# EAGLE board Orion Ground Base (EAGLE 9.2.2)
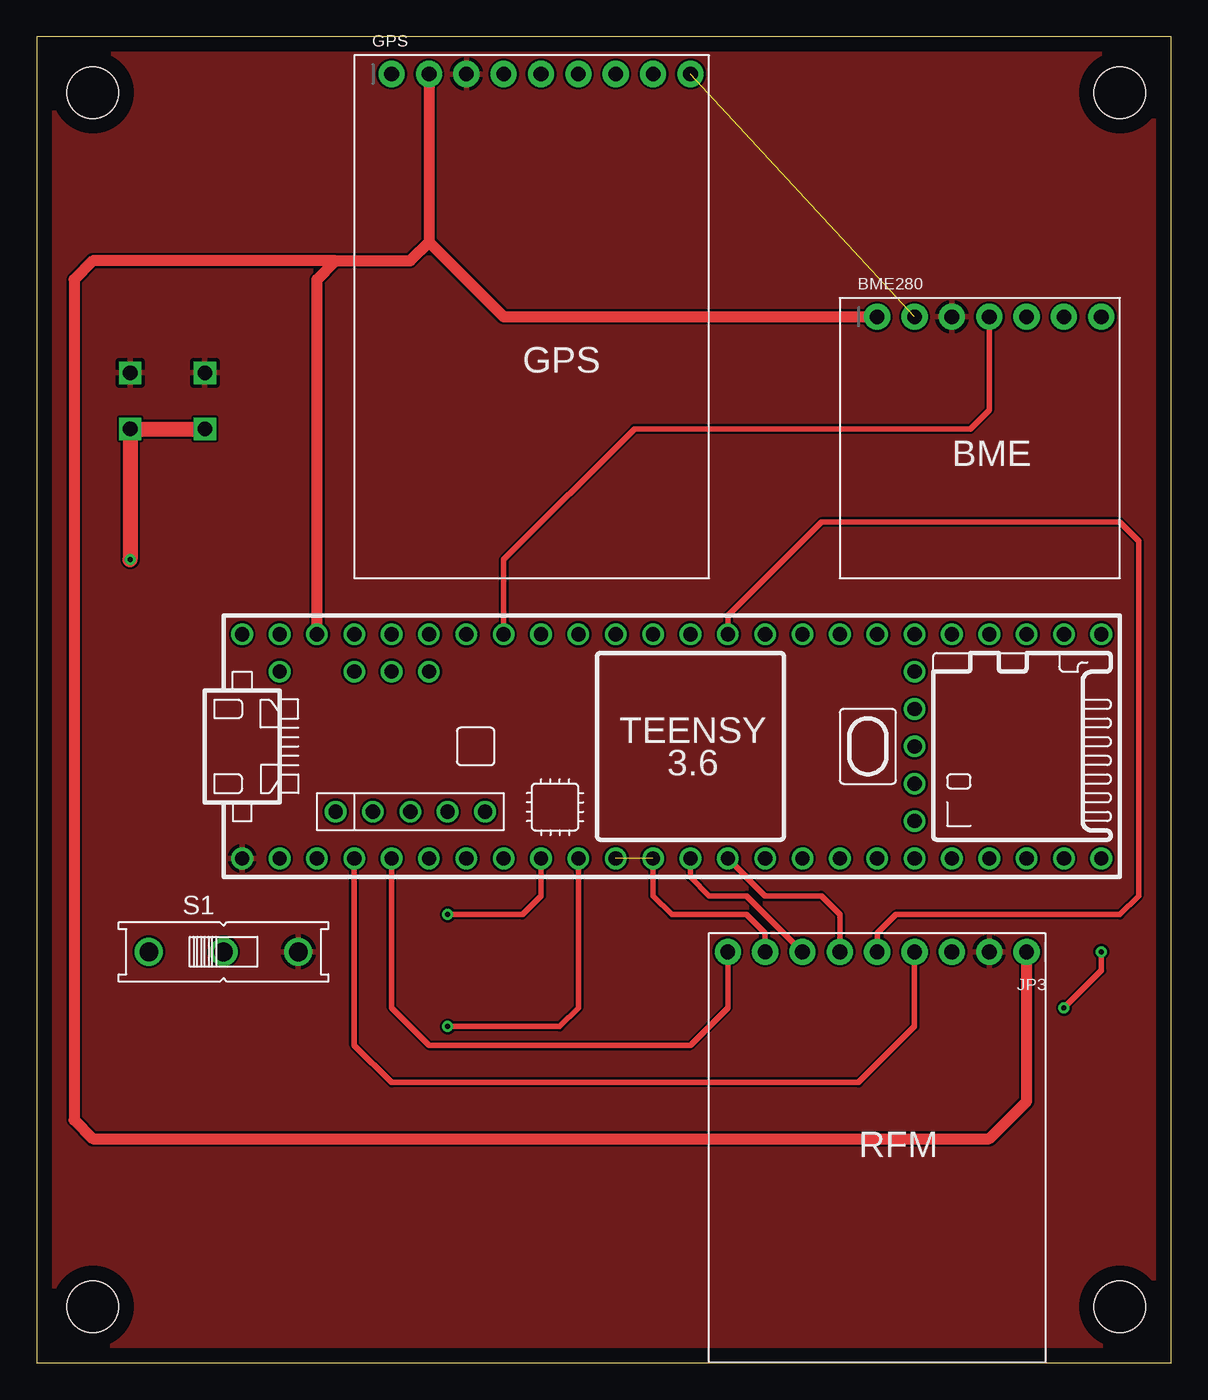
[diagram p0: board, top side]
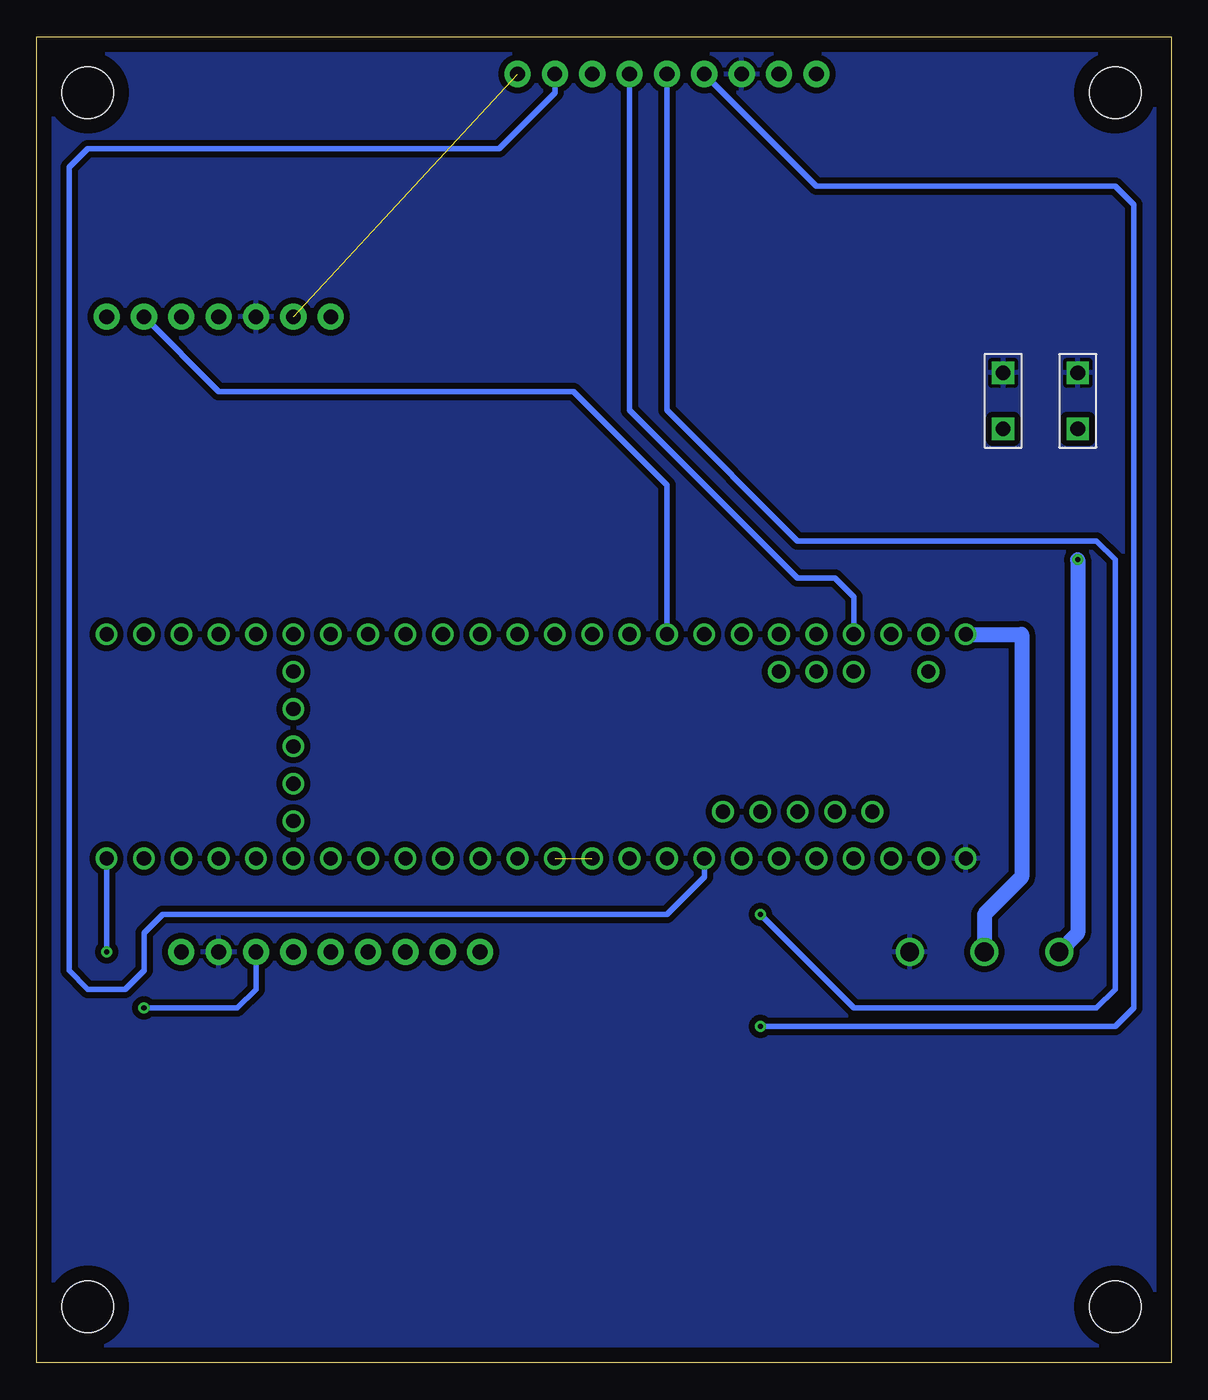
[diagram p1: board, bottom side, seen from below]

Size 77.14 x 90.16 mm. Coordinates in mm from the lower left corner, seen from the top.
Outline: 0,0 77.14,0 77.14,90.16 0,90.16 0,0
Copper layers (1*16): Top 0.035mm / dielectric 1.5mm / Bottom 0.035mm
Design rules "default": minimum track width 6mil, minimum drill 0.35mm, track to track 6mil, track to pad 6mil, pad to pad 6mil, via to via 6mil, smd to smd 6mil, copper to edge 40mil, drill to drill 6mil, minimum pad ring 10mil, minimum via ring 8mil, stop-mask expansion 4mil, vias tented up to drill 0mil, thermal gap 10mil
Holes 3.5 mm at 3.81,3.81 73.66,3.81 73.66,86.36 3.81,86.36

## Footprints (pad centres in the part's own frame; a part is rotated, then mirrored left to right if it is on the bottom)
1X07_ROUND_70 = drill 1 pad 1.778: 1 -7.62,0; 2 -5.08,0; 3 -2.54,0; 4 0,0; 5 2.54,0; 6 5.08,0; 7 7.62,0
1X09_ROUND_70 = drill 1 pad 1.778: 1 -10.16,0; 2 -7.62,0; 3 -5.08,0; 4 -2.54,0; 5 0,0; 6 2.54,0; 7 5.08,0; 8 7.62,0; 9 10.16,0
EG1218 = drill 1.27 pad 1.676: O -5.08,0; P 0,0; S 5.08,0
TEENSY_3.5/3.6 = drill 0.965: 0/RX -25.4,-7.62; 1/TX -22.86,-7.62; 2 -20.32,-7.62; 3/CANTX -17.78,-7.62; 3V3 7.62,-7.62; 3V3_2 17.78,-2.54; 3V3_LO -22.86,7.62; 4/CANRX -15.24,-7.62; 5 -12.7,-7.62; 6 -10.16,-7.62; 7 -7.62,-7.62; 8 -5.08,-7.62; 9/CS -2.54,-7.62; 10/CS 0,-7.62; 11/MOSI 2.54,-7.62; 12/MISO 5.08,-7.62; 13/SCK 5.08,7.62; 14/A0 2.54,7.62; 15/A1 0,7.62; 16/A2 -2.54,7.62; 17/A3 -5.08,7.62; 18/A4/SDA -7.62,7.62; 19/A5/SCL -10.16,7.62; 20/A6 -12.7,7.62; 21/A7 -15.24,7.62; 21/DAC0 12.7,7.62; 22/A8 -17.78,7.62; 23/A9 -20.32,7.62; 24 10.16,-7.62; 25 12.7,-7.62; 26 15.24,-7.62; 27 17.78,-7.62; 28 20.32,-7.62; 29 22.86,-7.62; 30 25.4,-7.62; 31/A12 27.94,-7.62; 32/A13 30.48,-7.62; 33/A14 30.48,7.62; 34/A15 27.94,7.62; 35/A16 25.4,7.62; 36/A17 22.86,7.62; 37/A18 20.32,7.62; 38/A19 17.78,7.62; 39/A20 15.24,7.62; A10 -17.78,5.08; A11 -15.24,5.08; A22/DAC1 10.16,7.62; AGND -25.4,7.62; AREF -20.32,5.08; GND -27.94,-7.62; GND2 7.62,7.62; GND3 17.78,0; PROG 17.78,2.54; RESET 17.78,5.08; U5V -21.59,-4.445; UD+ -16.51,-4.445; UD- -19.05,-4.445; UGND1 -13.97,-4.445; UGND2 -11.43,-4.445; VBAT 17.78,-5.08; VIN -27.94,7.62; VUSB -25.4,5.08
2PINS = drill 1 square: P$1 0,2.54; P$2 0,-1.27

## Placement (x,y rotation side)
BME280  [1X07_ROUND_70]  64.77,71.12 0 top
GPS  [1X09_ROUND_70]  34.29,87.63 0 top
JP3  [1X09_ROUND_70]  57.15,27.94 180 top
S1  [EG1218]  12.7,27.94 0 top
U$1  TEENSY_3.5/3.6  [TEENSY_3.5/3.6]  41.91,41.91 0 top
U$7  2PINS  [2PINS]  6.35,64.77 0 top
U$8  2PINS  [2PINS]  11.43,64.77 0 top

## Library data of the parts
BME280 GPS JP3 = microbuilder
S1 = switch
U$1 = teensy356
U$7 U$8 = 6pins

## Nets
1PPS: GPS.1
3.3V: BME280.2 GPS.9
CS_5V: BME280.7
DIO0: JP3.4 U$1.2
EN: JP3.3 U$1.32/A13
ENABLE: GPS.8 U$1.6
FIX: GPS.6 U$1.23/A9
GND: BME280.3 GPS.3 JP3.2 S1.S U$1.GND U$7.P$1 U$8.P$1
MISO_3V: JP3.6 U$1.12/MISO
MOSI_5V: JP3.7 U$1.11/MOSI
N$1: JP3.8 U$1.9/CS U$1.10/CS
N$3: S1.P U$1.VIN
N$16: S1.O U$7.P$2 U$8.P$2
RST_5V: JP3.9 U$1.3/CANTX
RX: GPS.4 U$1.8
SCK_5V: JP3.5 U$1.13/SCK
SCL: BME280.4 U$1.19/A5/SCL
SDA: BME280.6 U$1.18/A4/SDA
SDO/ADR_3V: BME280.5
TX: GPS.5 U$1.7
VBACKUP: GPS.7
VIN: BME280.1 GPS.2 JP3.1 U$1.3V3_LO

## Tracks (layer width: path | path; a pad name or v marks a point on that pad's centre or on a via)
3.3V  (1 unrouted)
DIO0
  Top 0.381: JP3.4 59.69,22.86 55.88,19.05 24.13,19.05 21.59,21.59 U$1.2
EN  (via drill 0.35)
  Top 0.381: v69.85,24.13 72.39,26.67 v72.39,27.94
  Bottom 0.381: JP3.3 62.23,25.4 63.5,24.13 v69.85,24.13 | v72.39,27.94 U$1.32/A13
ENABLE
  Bottom 0.381: GPS.8 41.91,86.36 45.72,82.55 73.66,82.55 74.93,81.28 74.93,26.67 73.66,25.4 71.12,25.4 69.85,26.67 69.85,29.21 68.58,30.48 34.29,30.48 31.75,33.02 U$1.6
FIX
  Bottom 0.381: GPS.6 36.83,64.77 25.4,53.34 22.86,53.34 21.59,52.07 U$1.23/A9
GND
  pour Bottom (isolate 0.406): -2.54,93.98 -2.54,-2.54 80.01,-2.54 80.01,93.98
  pour Top: -1.27,92.71 -1.27,-1.27 78.74,-1.27 78.74,92.71
MISO_3V
  Top 0.381: U$1.12/MISO 49.53,31.75 53.34,31.75 54.61,30.48 JP3.6
MOSI_5V
  Top 0.381: JP3.7 48.26,31.75 45.72,31.75 44.45,33.02 U$1.11/MOSI
N$1  (1 unrouted)
  Top 0.381: U$1.10/CS 41.91,31.75 43.18,30.48 48.26,30.48 49.53,29.21 JP3.8
N$3
  Bottom 1.016: U$1.VIN 10.16,49.53 10.16,33.02 12.7,30.48 S1.P
N$16  (via drill 0.35)
  Top 1.016: v6.35,54.61 U$7.P$2 U$8.P$2
  Bottom 1.016: S1.O 6.35,29.21 v6.35,54.61
RST_5V
  Top 0.381: U$1.3/CANTX 24.13,24.13 26.67,21.59 44.45,21.59 46.99,24.13 JP3.9
RX  (via drill 0.35)
  Top 0.381: U$1.8 36.83,24.13 35.56,22.86 v27.94,22.86
  Bottom 0.381: GPS.4 24.13,80.01 3.81,80.01 2.54,78.74 2.54,24.13 3.81,22.86 v27.94,22.86
SCK_5V
  Top 0.381: U$1.13/SCK 46.99,50.8 53.34,57.15 73.66,57.15 74.93,55.88 74.93,31.75 73.66,30.48 58.42,30.48 57.15,29.21 JP3.5
SCL
  Top 0.381: U$1.19/A5/SCL 31.75,54.61 40.64,63.5 63.5,63.5 64.77,64.77 BME280.4
SDA
  Bottom 0.381: BME280.6 64.77,66.04 40.64,66.04 34.29,59.69 U$1.18/A4/SDA
TX  (via drill 0.35)
  Top 0.381: U$1.7 34.29,31.75 33.02,30.48 v27.94,30.48
  Bottom 0.381: GPS.5 34.29,64.77 25.4,55.88 5.08,55.88 3.81,54.61 3.81,25.4 5.08,24.13 21.59,24.13 v27.94,30.48
VIN
  Top 0.762: 20.32,74.93 25.4,74.93 26.67,76.2 | JP3.1 67.31,17.78 64.77,15.24 3.81,15.24 2.54,16.51 2.54,73.66 3.81,74.93 20.32,74.93 | GPS.2 26.67,76.2 | 26.67,76.2 31.75,71.12 BME280.1 | U$1.3V3_LO 19.05,73.66 20.32,74.93

## Text on the board
tNames: GPS | BME | RFM